# Altium PCB AnchorBoardSmall_SNS.PcbDoc (part 2 of 2)
Units mm, origin at the board's own origin, x right, y up, seen from the top; angles counter-clockwise.
Board outline 52.5 x 37.5 mm, 6 copper layers (Top Layer, Ground, Mid-Layer 2, Mid-Layer 3, Power, Bottom Layer), stack 1.141 mm thick; 164 components, 143 nets, 548 pads, 294 vias.
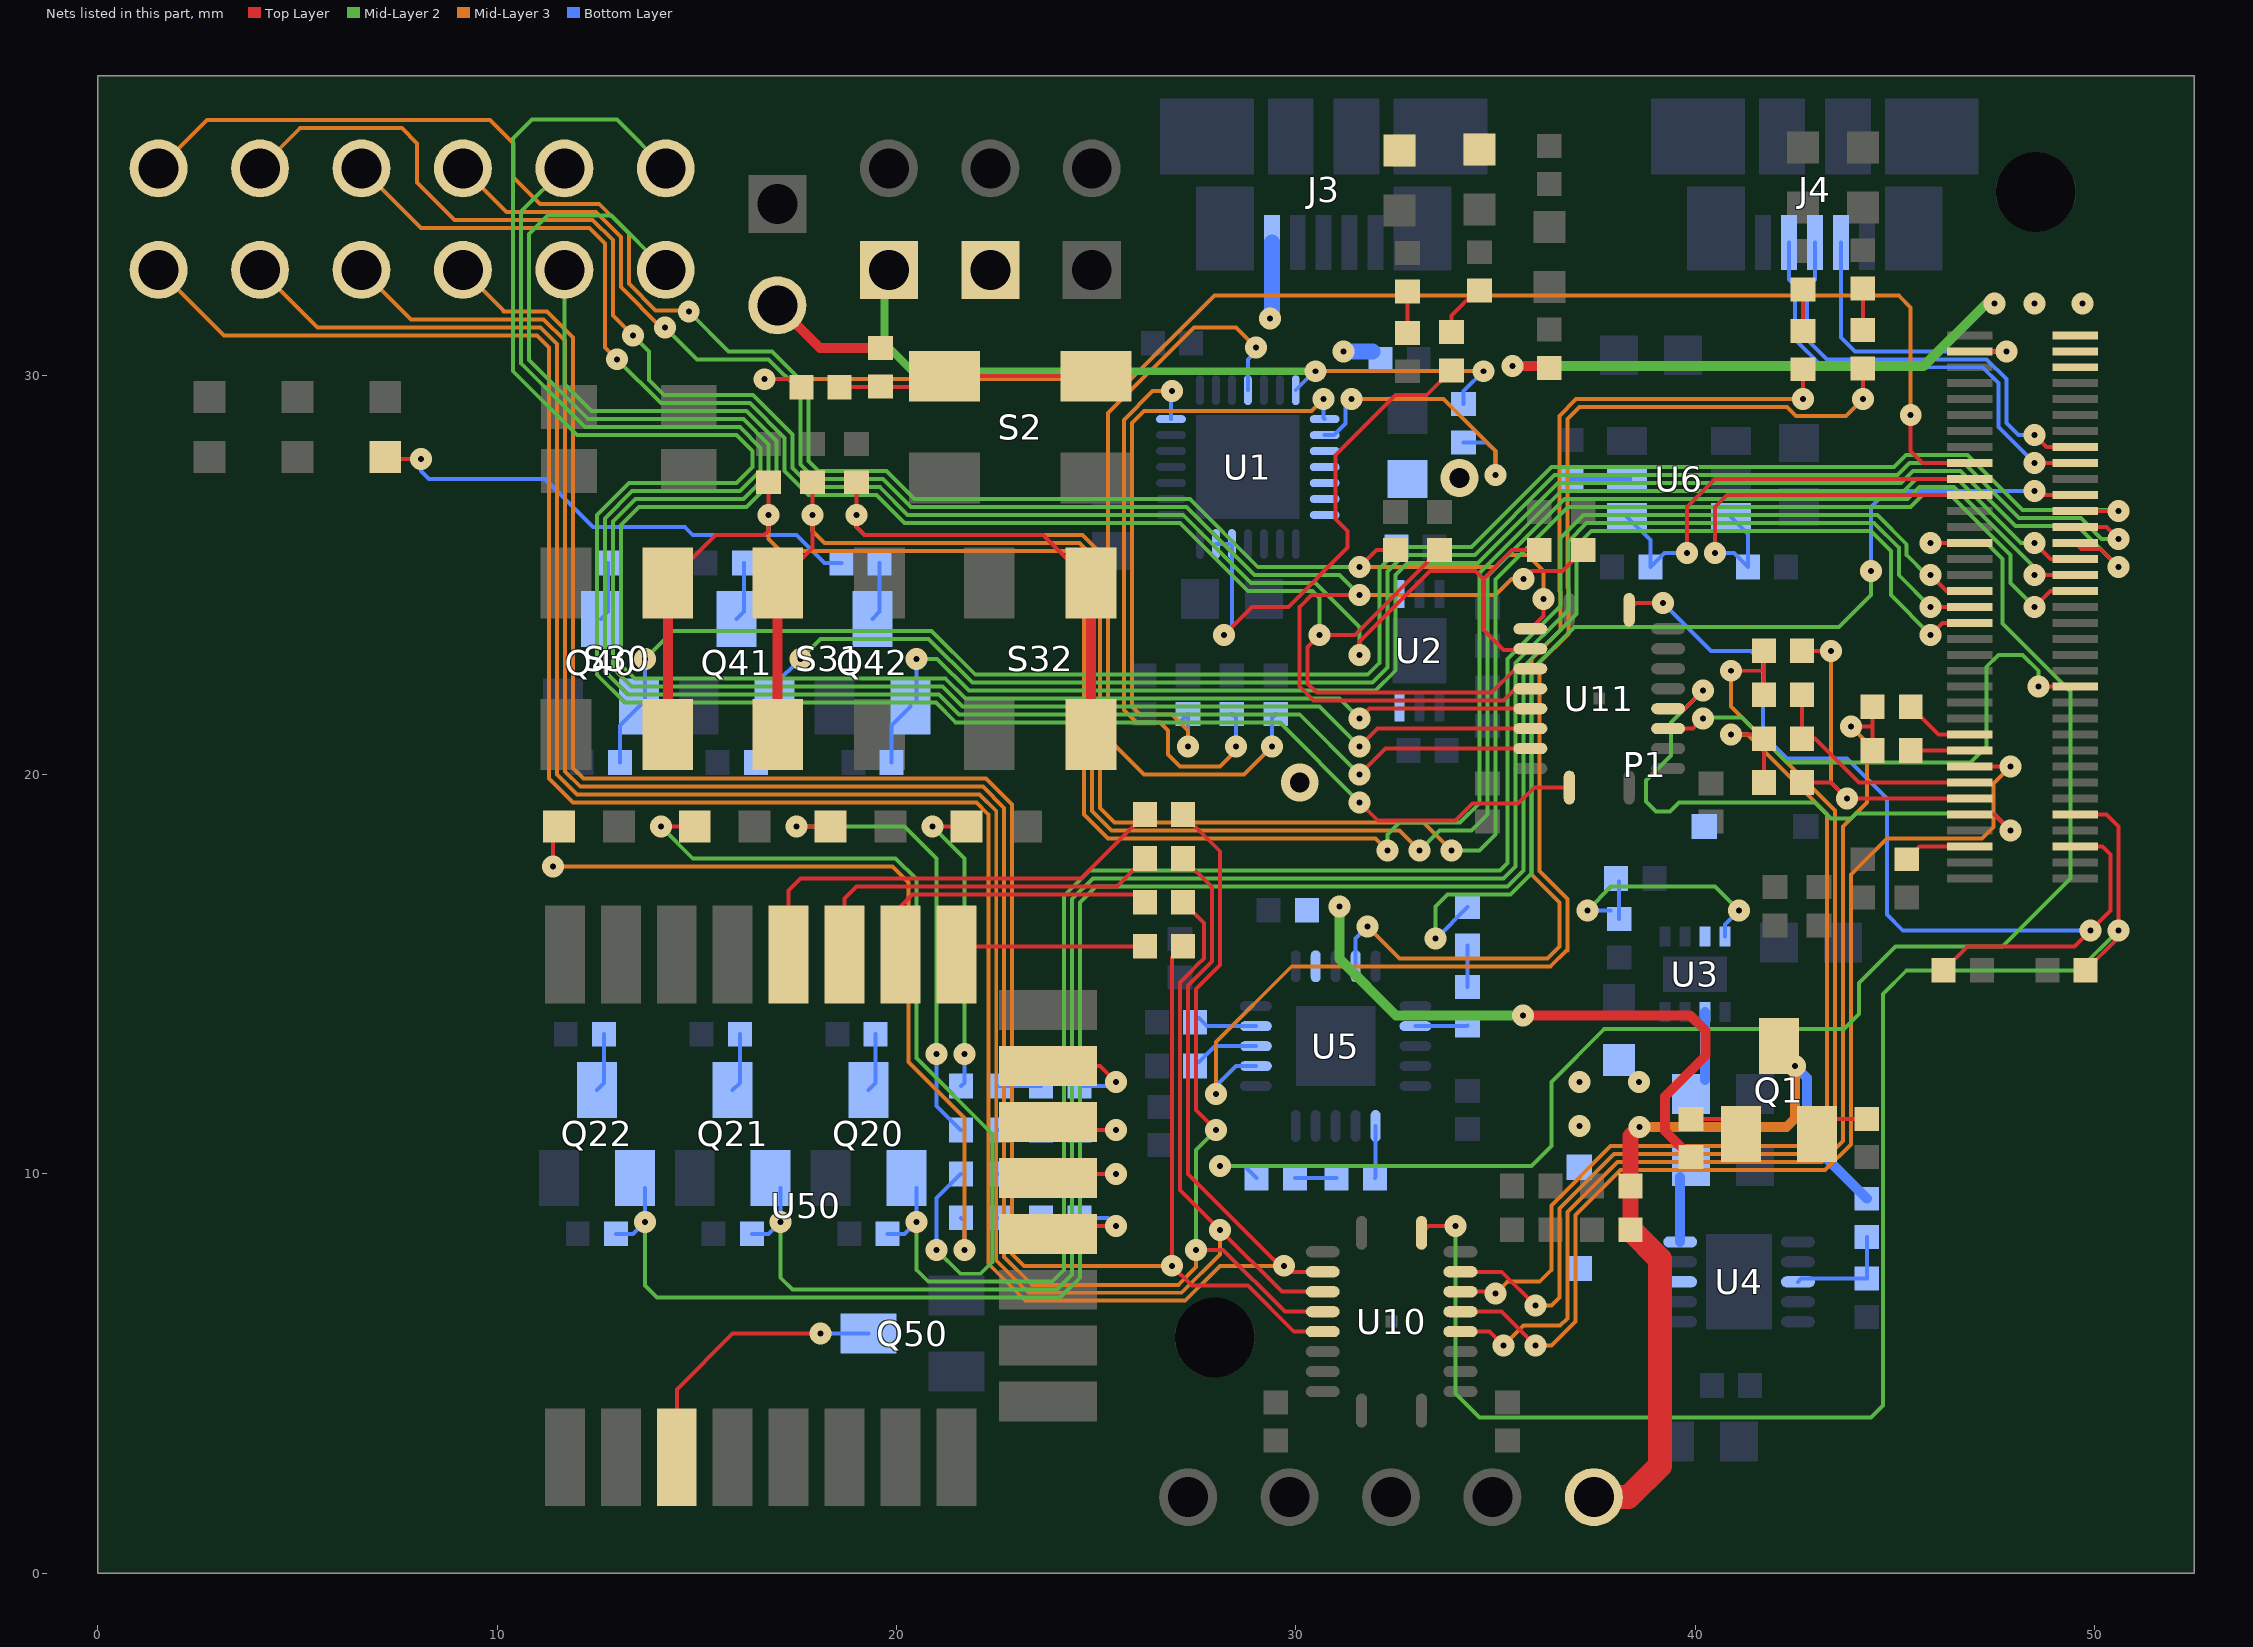
[diagram p6: the nets of this part, all layers, seen from the top]

## Via types
v1: diameter 0.55, hole 0.15, Top Layer to Bottom Layer, 287 vias
v2: diameter 0.95, hole 0.5, Top Layer to Bottom Layer, 6 vias
v3: diameter 0.55/0.55/0.55/0.55 (per signal layer), hole 0.15, Top Layer to Bottom Layer, 1 vias

## Nets (pads, with @x,y where several pads share a name; then routed paths per layer and width w, separated by ;. In a path a pad name is that pad's centre, name@x,y a point inside that pad or via, vN(x,y) a via of type N, cw(c..) or ccw(c..) an arc to the next point about the centre after c; other vN are vias at no path point) (continued)
NetD42_2: D42.2 R142.1 | length 12.7
  Top Layer w0.1: D42.2@7.2,27.95 7.25,27.9 v1(8.1,27.9)
  Bottom Layer w0.1: v1(8.1,27.9) 8.1,27.6 8.3,27.4 11.2,27.4 12.4,26.2 14.7,26.2 14.9,26 17.5,26 18.2,25.3 R142.1@18.62,25.3
NetD50_1: D50.1 R150.2 | length 7.7
  Top Layer w0.1: v1(20.9,18.7) D50.1@21.75,18.7
  Mid-Layer 2 w0.1: v1(20.9,18.7) 21.7,17.9 v1(21.7,13)
  Bottom Layer w0.1: R150.2@21.62,12.2 21.7,12.28 v1(21.7,13)
NetD51_1: D51.1 R151.2 | length 11.7
  Top Layer w0.1: v1(17.5,18.7) D51.1@18.35,18.7
  Mid-Layer 2 w0.1: v1(17.5,18.7) 20.2,18.7 21,17.9 v1(21,13)
  Bottom Layer w0.1: v1(21,13) 21,11.7 21.6,11.1 R151.2@21.62,11.1
NetD52_1: D52.1 R152.2 | length 22.1
  Top Layer w0.1: v1(14.1,18.7) D52.1@14.95,18.7
  Mid-Layer 2 w0.1: v1(14.1,18.7) 14.9,17.9 19.983,17.9 20.5,17.383 20.5,12.899 22.4,10.999 22.4,7.8 22.1,7.5 21.6,7.5 v1(21,8.1)
  Bottom Layer w0.1: v1(21,8.1) 21,9.4 21.6,10 R152.2@21.62,10
NetD53_1: D53.1 R153.2 | length 20.5
  Top Layer w0.1: v1(11.4,17.7) D53.1@11.4,18.55
  Mid-Layer 3 w0.1: v1(11.4,17.7) 19.9,17.7 20.3,17.3 20.3,12.8 21.7,11.4 v1(21.7,8.1)
  Bottom Layer w0.1: R153.2@21.62,8.9 21.7,8.82 v1(21.7,8.1)
NetJ2_1: J2.1 U2.6
  other v2: 30.1,19.8
NetL1_1: L1.1 U3.7
NetL2_2: L2.2 U4.3
NetP1_24: P1.24 Q40.1 R143.1 | length 45.8
  Top Layer w0.1: P1.24@49.52,26.6 v1(50.6,26.6)
  Mid-Layer 2 w0.1: v1(13.7,22.9) 14.4,23.6 20.883,23.6 21.983,22.5 31.8,22.5 32.1,22.8 32.1,25.166 32.634,25.7 34.4,25.7 36.4,27.7 44.986,27.7 45.286,28 46.825,28 48.2,26.625 50.575,26.625 v1(50.6,26.6)
  Bottom Layer w0.1: R143.1@13.08,20.3 13.08,21.23 13.7,21.85 v1(13.7,22.9)
NetP1_26: P1.26 Q41.1 R144.1 | length 41.9
  Top Layer w0.1: P1.26@49.52,26.2 50.3,26.2 v1(50.6,25.9)
  Mid-Layer 2 w0.1: v1(17.6,22.9) 18.1,23.4 20.8,23.4 21.9,22.3 31.266,22.3 31.917,22.3 32.3,22.683 32.3,25.083 32.717,25.5 34.483,25.5 36.483,27.5 45.069,27.5 45.369,27.8 46.731,27.8 48.106,26.425 49.658,26.425 50.183,25.9 v1(50.6,25.9)
  Bottom Layer w0.1: R144.1@16.48,20.3 16.48,21.23 Q41.1@16.95,21.7 ; Q41.1@16.95,22.25 v1(17.6,22.9)
NetP1_28: P1.28 Q42.1 R145.1 | length 39.1
  Top Layer w0.1: P1.28@49.52,25.8 49.67,25.65 50.152,25.65 50.6,25.202 v1(50.6,25.2)
  Mid-Layer 2 w0.1: v1(20.5,22.9) 21.017,22.9 21.817,22.1 31.183,22.1 32,22.1 32.5,22.6 32.5,25 32.8,25.3 34.566,25.3 36.566,27.3 45.151,27.3 45.451,27.6 46.649,27.6 48.024,26.225 49.575,26.225 v1(50.6,25.2)
  Bottom Layer w0.1: R145.1@19.88,20.3 19.88,21.231 Q42.1@20.35,21.7 ; Q42.1@20.5,21.851 v1(20.5,22.9)
NetP1_30: P1.30 R130.2 S30.2 | length 56.7
  Top Layer w0.1: S30.2@14.275,24.8 15.475,26 16.7,26 16.8,26.1 v1(16.8,26.5) R130.2@16.8,27.32 ; v1(48.5,25.8) 48.9,25.4 P1.30@49.52,25.4
  Top Layer w0.25: S30.2@14.275,21 S30.2@14.275,24.8
  Mid-Layer 2 w0.1: v1(32.3,18.1) 32.3,18.5 32.6,18.8 34.118,18.8 34.6,19.282 34.6,25.051 36.649,27.1 45.234,27.1 45.534,27.4 46.566,27.4 48.166,25.8 v1(48.5,25.8)
  Mid-Layer 3 w0.1: v1(16.8,26.5) 16.8,25.9 17.1,25.6 24.5,25.6 24.7,25.4 24.7,19 25.3,18.4 32,18.4 v1(32.3,18.1)
NetP1_32: P1.32 R131.2 S31.2 | length 54
  Top Layer w0.1: S31.2@17.025,24.8 17.9,25.675 v1(17.9,26.498) R131.2@17.9,27.32 ; v1(48.5,25) P1.32@49.52,25
  Top Layer w0.25: S31.2@17.025,21 S31.2@17.025,24.8
  Mid-Layer 2 w0.1: v1(33.1,18.1) 33.6,18.6 34.4,18.6 34.8,19 34.8,24.969 36.731,26.9 45.317,26.9 45.617,27.2 46.483,27.2 48.5,25.183 v1(48.5,25)
  Mid-Layer 3 w0.1: v1(17.9,26.498) 17.9,26.1 18.2,25.8 24.583,25.8 24.9,25.483 24.9,19.083 25.383,18.6 32.6,18.6 v1(33.1,18.1)
NetP1_33: P1.33 Q20.1 R123.1 | length 47.8
  Top Layer w0.1: v1(45.9,25) 46.3,24.6 P1.33@46.88,24.6
  Mid-Layer 2 w0.1: v1(20.5,8.8) 20.5,7.6 20.8,7.3 23.9,7.3 24.2,7.6 24.2,16.966 24.834,17.6 35.117,17.6 35.3,17.783 35.3,22.9 36.375,23.975 ; 36.376,23.975 36.625,24.224 36.625,25.925 37.2,26.5 44.566,26.5 45.3,25.766 45.3,25.5 45.8,25 v1(45.9,25)
  Bottom Layer w0.1: R123.1@19.78,8.5 20.2,8.5 v1(20.5,8.8) Q20.1@20.5,9.65
NetP1_34: P1.34 R132.2 S32.2 | length 58.5
  Top Layer w0.1: R132.2@19,27.32 v1(19,26.5) 19,26.2 19.2,26 23.675,26 S32.2@24.875,24.8 ; v1(48.5,24.2) 48.9,24.6 P1.34@49.52,24.6
  Top Layer w0.25: S32.2@24.875,21 S32.2@24.875,24.8
  Mid-Layer 2 w0.1: v1(33.9,18.1) 34.6,18.1 35,18.5 35,24.886 36.814,26.7 45.4,26.7 45.7,27 46.4,27 47.9,25.5 47.9,24.8 v1(48.5,24.2)
  Mid-Layer 3 w0.1: v1(19,26.5) 19,26.2 19.2,26 24.666,26 25.1,25.566 25.1,19.166 25.466,18.8 33.2,18.8 v1(33.9,18.1)
NetP1_35: P1.35 Q21.1 R124.1 | length 51.7
  Top Layer w0.1: v1(45.9,24.2) P1.35@46.88,24.2
  Mid-Layer 2 w0.1: v1(17.1,8.8) 17.1,7.4 17.4,7.1 24.017,7.1 24.4,7.483 24.4,16.883 24.917,17.4 35.2,17.4 35.5,17.7 35.5,22.8 36.825,24.125 36.825,25.842 37.283,26.3 44.483,26.3 45.1,25.683 45.1,25 v1(45.9,24.2)
  Bottom Layer w0.1: R124.1@16.38,8.5 16.8,8.5 v1(17.1,8.8) Q21.1@17.1,9.65
NetP1_37: P1.37 Q22.1 R125.1 | length 55.9
  Top Layer w0.1: v1(45.9,23.5) 46.2,23.8 P1.37@46.88,23.8
  Mid-Layer 2 w0.1: v1(13.7,8.8) 13.7,7.2 14,6.9 24.1,6.9 24.6,7.4 24.6,16.8 25,17.2 35.3,17.2 35.7,17.6 35.7,22.7 37.025,24.025 37.025,25.725 37.4,26.1 44.4,26.1 44.9,25.6 44.9,24.5 v1(45.9,23.5)
  Bottom Layer w0.1: R125.1@12.98,8.5 13.4,8.5 v1(13.7,8.8) Q22.1@13.7,9.65
NetP1_51: P1.51 R105.1 | length 1.8
  Top Layer w0.1: R105.1@45.4,21.7 46.1,21 P1.51@46.88,21
NetP1_53: P1.53 R106.1 | length 1.5
  Top Layer w0.1: R106.1@45.4,20.6 P1.53@46.88,20.6
NetP1_55: P1.55 U10.6 | length 27.3
  Top Layer w0.1: U10.6@34.125,6.55 35.15,6.55 v1(36,5.7) ; P1.55@46.88,20.2 v1(47.9,20.2)
  Mid-Layer 3 w0.1: v1(36,5.7) 36.4,5.7 37,6.3 37,8.966 38.134,10.1 43.259,10.1 43.9,10.741 43.9,17.5 44.8,18.4 47.183,18.4 47.475,18.692 47.475,19.775 v1(47.9,20.2)
NetP1_57: P1.57 R101.2 R104.2 | length 5.8
  Top Layer w0.1: R104.2@42.68,22 R101.2@42.68,20.9 43,20.9 44.1,19.8 P1.57@46.88,19.8
NetP1_59: P1.59 R102.2 R103.2 | length 9
  Top Layer w0.1: R102.2@42.68,19.8 43.4,19.8 v1(43.8,19.4) P1.59@46.88,19.4 ; R103.2@42.68,23.1 v1(43.4,23.1)
  Mid-Layer 3 w0.1: v1(43.4,23.1) 43.4,19.8 v1(43.8,19.4)
NetP1_65: P1.65 R100.1 | length 1.7
  Top Layer w0.1: R100.1@45.3,17.88 45.62,18.2 P1.65@46.88,18.2
NetQ1_1: Q1.1 R13.2 | length 1.4
  Top Layer w0.1: R13.2@39.9,11.38 40.77,11.38 Q1.1@41.15,11
NetQ1_2: Q1.2 R14.1 | length 1.4
  Top Layer w0.1: Q1.2@43.05,11 43.43,11.38 R14.1@44.3,11.38
NetQ20_3: Q20.3 R120.1 | length 1.5
  Bottom Layer w0.1: Q20.3@19.3,12.1 19.48,12.28 R120.1@19.48,13.5
NetQ21_3: Q21.3 R121.1 | length 1.5
  Bottom Layer w0.1: Q21.3@15.9,12.1 16.08,12.28 R121.1@16.08,13.5
NetQ22_3: Q22.3 R122.1 | length 1.5
  Bottom Layer w0.1: Q22.3@12.5,12.1 12.68,12.28 R122.1@12.68,13.5
NetQ40_3: Q40.3 R140.2 | length 1.5
  Bottom Layer w0.1: Q40.3@12.6,23.9 12.78,24.08 R140.2@12.78,25.3
NetQ41_3: Q41.3 R141.2 | length 1.5
  Bottom Layer w0.1: Q41.3@16,23.9 16.18,24.08 R141.2@16.18,25.3
NetQ42_3: Q42.3 R142.2 | length 1.5
  Bottom Layer w0.1: Q42.3@19.4,23.9 19.58,24.081 R142.2@19.58,25.3
NetQ50_3: Q50.3 U50.3 | length 6.4
  Top Layer w0.1: U50.3@14.5,3.6 14.5,4.6 15.9,6 v1(18.1,6)
  Bottom Layer w0.1: v1(18.1,6) Q50.3@19.3,6
NetR1_1: R1.1 U1.7 | length 14.3
  Mid-Layer 3 w0.1: v1(26.9,29.6) 26.417,29.6 25.7,28.883 25.7,21.617 26.017,21.3 26.6,21.3 26.8,21.1 26.8,20.5 27.1,20.2 28.1,20.2 28.5,20.6 v1(28.5,20.7)
  Bottom Layer w0.1: U1.7@26.875,28.9 26.875,29.575 v1(26.9,29.6) ; R1.1@28.4,21.52 28.5,21.42 v1(28.5,20.7)
NetR2_1: R2.1 U1.11 | length 19.7
  Mid-Layer 3 w0.1: v1(29,30.7) 28.5,31.2 27.451,31.2 25.3,29.049 25.3,20.9 26.2,20 28.7,20 v1(29.4,20.7)
  Bottom Layer w0.1: U1.11@28.8,29.625 28.8,30.4 29,30.6 v1(29,30.7) ; v1(29.4,20.7) 29.4,21.42 R2.1@29.5,21.52
NetR3_2: R3.2 U1.15 | length 15.8
  Mid-Layer 3 w0.1: v1(27.3,20.7) 27.3,21.1 26.9,21.5 26.1,21.5 25.9,21.7 25.9,28.8 26.2,29.1 30.4,29.1 v1(30.7,29.4)
  Bottom Layer w0.1: R3.2@27.1,21.32 R3.2@27.3,21.52 v1(27.3,20.7) ; v1(30.7,29.4) 30.7,28.925 U1.15@30.725,28.9
NetR4_1: R4.1 R15.1 U1.14 | length 18.9
  Mid-Layer 2 w0.2: R15.1@19.812,32.639 19.7,32.527 19.7,30.8 20.4,30.1 v1(30.5,30.1)
  Mid-Layer 3 w0.1: v1(30.5,30.1) v1(34.7,30.1)
  Bottom Layer w0.1: U1.14@30,29.625 30.475,30.1 v1(30.5,30.1) ; R4.1@34.2,29.28 34.2,29.6 v1(34.7,30.1)
NetR4_2: R4.2 U1.16 | length 7.5
  Mid-Layer 3 w0.1: v1(31.4,29.4) 33.7,29.4 35,28.1 v1(35,27.5)
  Bottom Layer w0.1: U1.16@30.725,28.5 30.954,28.5 31.25,28.796 31.25,29.25 v1(31.4,29.4) ; R4.2@34.2,28.32 34.78,28.32 35,28.1 v1(35,27.5)
NetR5_1: R5.1 U1.26 U1.27 | length 13
  Top Layer w0.1: v1(28.2,23.5) 28.9,24.2 29.817,24.2 31.3,25.683 31.3,26.1 31,26.4 31,28 32.5,29.5 33.28,29.5 R5.1@33.9,30.12
  Bottom Layer w0.1: U1.27@28,25.775 28.2,25.775 U1.26@28.4,25.775 28.4,23.7 v1(28.2,23.5)
NetR5_2: R5.2 R6.2 | length 1.4
  Top Layer w0.1: R5.2@33.9,31.08 33.9,31.5 34.52,32.12 R6.2@34.6,32.12
NetR7_2: R7.2 R8.1 | length 1
  Top Layer w0.1: R7.2@32.8,31.06 R8.1@32.8,32.1
NetR11_2: R11.2 R12.2 S2.1 | length 6.5
  Top Layer w0.1: R11.2@18.58,29.7 20.925,29.7 S2.1@21.2,29.975 S2.1@25,29.975
NetR30_2: R30.2 R31.1 U3.8 | length 6.6
  Mid-Layer 2 w0.1: v1(37.3,16.6) 37.9,17.2 40.5,17.2 v1(41.1,16.6)
  Bottom Layer w0.1: v1(37.3,16.6) R30.2@37.88,16.6 ; R30.2@38.1,16.38 R31.1@38.1,17.32 ; U3.8@40.75,15.95 40.75,16.25 v1(41.1,16.6)
NetR40_1: R40.1 R41.2 U4.8 | length 2.8
  Bottom Layer w0.1: U4.8@42.577,7.298 42.656,7.378 R41.2@44.302,7.378 R40.1@44.302,8.418
NetR50_2: R50.2 U5.9 | length 1.5
  Bottom Layer w0.1: R50.2@27.58,13.9 27.78,13.7 U5.9@29,13.7
NetR51_2: R51.2 U5.8 | length 1.6
  Bottom Layer w0.1: R51.2@27.58,12.8 27.98,13.2 U5.8@29,13.2
NetR52_1: R52.1 R58.1 | length 1
  Bottom Layer w0.1: R52.1@34.3,14.68 R58.1@34.3,15.72
NetR52_2: R52.2 U5.17 | length 1.3
  Bottom Layer w0.1: U5.17@33,13.7 34.28,13.7 R52.2@34.3,13.72
NetR53_1: R53.1 R59.1 | length 1
  Bottom Layer w0.1: R59.1@29.98,9.9 R53.1@31.02,9.9
NetR53_2: R53.2 U5.1 | length 1.3
  Bottom Layer w0.1: R53.2@31.98,9.9 32,9.92 U5.1@32,11.2
NetR54_2: R54.2 R56.2 | length 1
  Top Layer w0.1: R56.2@42.7,31.11 R54.2@42.7,32.15
NetR55_1: R55.1 R57.2 | length 1
  Top Layer w0.1: R57.2@44.2,31.13 R55.1@44.2,32.17
NetR56_1: R56.1 U5.14 | length 27.3
  Top Layer w0.1: v1(42.7,29.4) R56.1@42.7,30.15
  Mid-Layer 3 w0.1: v1(31.8,16.2) 32.6,15.4 36.3,15.4 36.6,15.7 36.6,16.8 35.9,17.5 35.9,22.9 36.625,23.625 36.625,24.576 36.6,24.601 36.6,28.983 37.017,29.4 v1(42.7,29.4)
  Bottom Layer w0.1: U5.14@31.5,15.2 31.5,15.9 v1(31.8,16.2)
NetR57_1: R57.1 U5.7 | length 34.9
  Top Layer w0.1: v1(44.2,29.4) R57.1@44.2,30.17
  Mid-Layer 3 w0.1: v1(28,12) 28,13.3 29.9,15.2 36.383,15.2 36.783,15.6 36.8,15.6 36.8,16.883 36.1,17.583 36.1,22.8 36.825,23.525 36.825,24.659 36.8,24.684 36.8,28.9 37.1,29.2 42.299,29.2 42.524,28.975 43.775,28.975 v1(44.2,29.4)
  Bottom Layer w0.1: v1(28,12) 28,12.2 28.5,12.7 U5.7@29,12.7
NetR60_1: R60.1 U6.5 | length 1.4
  Bottom Layer w0.25: R60.1@36.92,27.4 U6.5@38.3,27.4
NetR101_1: R101.1 R102.1 U10.7 | length 24.9
  Top Layer w0.1: U10.7@34.125,7.05 34.95,7.05 v1(35,7) ; v1(40.9,21) R101.1@41.62,21 ; R102.1@41.72,19.8 R101.1@41.72,20.9
  Mid-Layer 3 w0.1: v1(35,7) 35.3,7.3 36.1,7.3 36.4,7.6 36.4,9.214 37.886,10.7 43.01,10.7 43.3,10.99 43.3,19.016 41.316,21 v1(40.9,21)
NetR103_1: R103.1 R104.1 U10.8 | length 27.5
  Top Layer w0.1: U10.8@34.125,7.55 35.15,7.55 v1(36,6.7) ; v1(40.9,22.6) 41.72,22.6 ; R104.1@41.72,22 41.72,22.6 ; R103.1@41.72,23.1 41.72,22.6
  Mid-Layer 3 w0.1: v1(36,6.7) 36.4,6.7 36.6,6.9 36.6,9.131 37.969,10.5 43.093,10.5 43.5,10.907 43.5,19.099 40.9,21.699 v1(40.9,22.6)
NetR105_2: R105.2 R106.2 U10.5 | length 25.8
  Top Layer w0.1: U10.5@34.125,6.05 34.85,6.05 v1(35.2,5.7) ; v1(43.9,21.2) 44.44,21.2 ; R106.2@44.44,20.6 44.44,21.2 ; R105.2@44.44,21.7 44.44,21.2
  Mid-Layer 3 w0.1: v1(35.2,5.7) 35.7,6.2 36.617,6.2 36.8,6.383 36.8,9.049 38.051,10.3 43.176,10.3 43.7,10.824 43.7,18.7 43.975,18.975 ; v1(43.9,21.2) 44.3,20.8 44.3,19.299 43.976,18.975
NetR108_1: R108.1 TP108.1 U10.16 | length 53.6
  Top Layer w0.1: R108.1@27.18,15.7 26.9,15.42 v1(26.9,7.7) 27.4,7.2 28.8,7.2 29.95,6.05 U10.16@30.675,6.05
  Mid-Layer 3 w0.1: TP108.1@9.144,32.639 10.16,31.623 10.16,31.6 11.249,31.6 11.9,30.949 11.9,20.166 12.166,19.9 22.249,19.9 22.9,19.249 22.9,8 23.2,7.7 v1(26.9,7.7)
NetR109_1: R109.1 TP109.1 U10.15 | length 60.7
  Top Layer w0.1: R109.1@27.18,19 28.1,18.08 28.1,15.232 27.5,14.632 27.5,11.6 v1(28,11.1) ; v1(27.5,8.1) 28.183,8.1 29.733,6.55 U10.15@30.675,6.55
  Mid-Layer 2 w0.1: v1(27.5,8.1) 27.5,10.6 v1(28,11.1)
  Mid-Layer 3 w0.1: TP109.1@6.604,32.639 7.843,31.4 11.166,31.4 11.7,30.866 11.7,20.083 12.083,19.7 22.166,19.7 22.7,19.166 22.7,7.917 23.393,7.224 27.059,7.224 27.5,7.666 v1(27.5,8.1)
NetR110_1: R110.1 TP110.1 U10.14 | length 60.9
  Top Layer w0.1: R110.1@27.18,16.8 27.7,16.28 27.7,15.398 27.542,15.24 27.54,15.24 27.4,15.1 27.4,15.098 27.1,14.798 27.1,12 27.1,9.6 v1(28.1,8.6) 29.65,7.05 U10.14@30.675,7.05
  Mid-Layer 3 w0.1: TP110.1@4.064,32.639 5.503,31.2 11.083,31.2 11.5,30.783 11.5,20 12,19.5 22.083,19.5 22.5,19.083 22.5,7.834 23.31,7.024 27.141,7.024 28.1,7.983 v1(28.1,8.6)
NetR111_1: R111.1 TP111.1 U10.13 | length 64.9
  Top Layer w0.1: R111.1@27.18,17.9 27.9,17.18 27.9,15.315 27.3,14.715 27.3,11.9 27.3,10 ; 27.301,10 v1@29.601,7.7 ; v1(29.7,7.7) 29.85,7.55 U10.13@30.675,7.55
  Mid-Layer 3 w0.1: TP111.1@1.524,32.639 3.163,31 11,31 11.3,30.7 11.3,19.9 11.9,19.3 22,19.3 22.3,19 22.3,7.751 23.227,6.824 27.224,6.824 28.1,7.7 v1(29.7,7.7)
NetR114_1: R114.1 TP104.1 U11.15 | length 44.4
  Top Layer w0.1: v1(31.6,24.5) 30.4,24.5 30.1,24.2 30.1,22.2 30.45,21.85 35.2,21.85 35.5,22.15 U11.15@35.875,22.15 ; v1(35.7,24.9) 35.9,25.1 36.68,25.1 R114.1@37.2,25.62
  Mid-Layer 2 w0.1: v1(14.2,31.2) 15.001,30.4 16.801,30.4 17.6,29.601 17.6,27.766 17.966,27.4 19.666,27.4 20.366,26.7 27.266,26.7 28.966,25 31.1,25 v1(31.6,24.5)
  Mid-Layer 3 w0.1: TP104.1@9.144,35.179 10.233,34.09 12.476,34.09 13.1,33.466 13.1,32.21 14.11,31.2 v1(14.2,31.2) ; v1(31.6,24.5) 35,24.5 35.4,24.9 v1(35.7,24.9)
NetR115_1: R115.1 TP105.1 U11.14 | length 42.5
  Top Layer w0.1: R115.1@33.6,25.62 31.48,23.5 v1(30.6,23.5) 30.3,23.2 30.3,22.283 30.533,22.05 34.9,22.05 35.5,22.65 U11.14@35.875,22.65
  Mid-Layer 2 w0.1: v1(13,30.4) 14.1,29.3 16.331,29.3 17.2,28.431 17.2,27.6 17.8,27 19.5,27 20.2,26.3 27.1,26.3 28.8,24.6 30.417,24.6 30.6,24.417 v1(30.6,23.5)
  Mid-Layer 3 w0.1: TP105.1@6.604,35.179 8.093,33.69 12.31,33.69 12.7,33.3 12.7,30.7 v1(13,30.4)
NetR116_1: R116.1 TP106.1 U11.13 | length 45
  Top Layer w0.1: v1(31.6,23) 31.6,23.337 33.363,25.1 34.5,25.1 34.7,24.9 ; U11.13@35.875,23.15 35.875,23.125 35.2,23.125 34.7,23.625 34.7,24.9 ; R116.1@36.1,25.62 35.42,25.62 34.7,24.9
  Mid-Layer 2 w0.1: v1(13.4,31) 13.8,30.6 13.8,29.883 14.183,29.5 16.414,29.5 17.4,28.514 17.4,27.683 17.883,27.2 19.583,27.2 20.283,26.5 27.183,26.5 28.883,24.8 30.5,24.8 31.6,23.7 v1(31.6,23)
  Mid-Layer 3 w0.1: TP106.1@4.064,35.179 5.071,36.186 7.614,36.186 8,35.8 8,34.828 8.938,33.89 12.393,33.89 12.9,33.383 12.9,31.5 v1(13.4,31)
NetR117_1: R117.1 TP107.1 U11.12 | length 45.1
  Top Layer w0.1: v1(31.6,25.2) 32.02,25.62 R117.1@32.5,25.62 ; U11.12@35.875,23.65 36.2,23.975 v1(36.2,24.4)
  Mid-Layer 2 w0.1: v1(14.8,31.6) 15.8,30.6 16.884,30.6 17.8,29.684 17.8,27.849 18.049,27.6 19.749,27.6 20.449,26.9 27.349,26.9 29.049,25.2 v1(31.6,25.2)
  Mid-Layer 3 w0.1: TP107.1@1.524,35.179 2.731,36.386 9.828,36.386 10.414,35.8 10.414,34.954 11.078,34.29 12.559,34.29 13.3,33.549 13.3,32.293 13.968,31.625 14.775,31.625 v1(14.8,31.6) ; v1(31.6,25.2) 35,25.2 35.3,25.5 35.8,25.5 36.2,25.1 v1(36.2,24.4)
NetR150_1: R150.1 R154.2 | length 1
  Bottom Layer w0.1: R150.1@22.58,12.2 R154.2@23.62,12.2
NetR151_1: R151.1 R155.2 | length 1
  Bottom Layer w0.1: R151.1@22.58,11.1 R155.2@23.62,11.1
NetR152_1: R152.1 R156.2 | length 1
  Bottom Layer w0.1: R152.1@22.58,10 R156.2@23.62,10
NetR153_1: R153.1 R157.2 | length 1
  Bottom Layer w0.1: R153.1@22.58,8.9 R157.2@23.62,8.9
NetR154_1: R154.1 U50.15 | length 2.8
  Top Layer w0.1: U50.15@23.795,12.7 25.1,12.7 v1(25.5,12.3)
  Bottom Layer w0.1: R154.1@24.58,12.2 25.4,12.2 v1(25.5,12.3)
NetR155_1: R155.1 U50.14 | length 2.7
  Top Layer w0.1: U50.14@23.795,11.3 23.995,11.1 v1(25.5,11.1)
  Bottom Layer w0.1: R155.1@24.58,11.1 v1(25.5,11.1)
NetR156_1: R156.1 U50.13 | length 2.7
  Top Layer w0.1: U50.13@23.795,9.9 23.895,10 v1(25.5,10)
  Bottom Layer w0.1: R156.1@24.58,10 v1(25.5,10)
NetR157_1: R157.1 U50.12 | length 2.8
  Top Layer w0.1: U50.12@23.795,8.5 23.995,8.7 v1(25.5,8.7)
  Bottom Layer w0.1: R157.1@24.58,8.9 25.3,8.9 v1(25.5,8.7)
NetTP100_1: TP100.1 U11.20 | length 52.2
  Top Layer w0.1: v1(31.6,19.3) 32.054,18.846 34.004,18.846 34.428,19.27 35.57,19.27 35.975,19.675 U11.20@36.85,19.675
  Mid-Layer 2 w0.1: TP100.1@14.224,35.179 13.003,36.4 10.873,36.4 10.4,35.927 10.4,30.1 12,28.5 16,28.5 16.4,28.1 16.4,27.7 16,27.3 13.3,27.3 12.5,26.5 12.5,22.5 13.2,21.8 20.986,21.8 21.486,21.3 29.6,21.3 v1(31.6,19.3)
NetTP101_1: TP101.1 U11.18 | length 45.5
  Top Layer w0.1: v1(31.6,20) 32.25,20.65 U11.18@35.875,20.65
  Mid-Layer 2 w0.1: TP101.1@11.684,35.179 10.6,34.095 10.6,30.3 12.2,28.7 12.3,28.7 16.083,28.7 16.6,28.183 16.6,27.617 16.083,27.1 13.383,27.1 12.7,26.417 12.7,22.583 13.283,22 21.069,22 21.569,21.5 30.1,21.5 v1(31.6,20)
NetTP102_1: TP102.1 U11.17 | length 47
  Top Layer w0.1: v1(31.6,20.7) 32.05,21.15 U11.17@35.875,21.15
  Mid-Layer 2 w0.1: TP102.1@14.224,32.639 12.863,34 11.267,34 10.8,33.533 10.8,30.383 12.283,28.9 16.166,28.9 16.8,28.266 16.8,27.534 16.166,26.9 13.466,26.9 12.9,26.334 12.9,22.666 13.366,22.2 21.151,22.2 21.651,21.7 30.6,21.7 v1(31.6,20.7)
NetTP103_1: TP103.1 U11.16 | length 41
  Top Layer w0.1: v1(31.6,21.4) 31.85,21.65 U11.16@35.875,21.65
  Mid-Layer 2 w0.1: TP103.1@11.684,32.639 11.684,29.782 12.366,29.1 16.249,29.1 17,28.349 17,27.451 16.249,26.7 13.549,26.7 13.1,26.251 13.1,22.749 13.449,22.4 21.234,22.4 21.734,21.9 31.1,21.9 v1(31.6,21.4)
PWRBTN: P1.17 R11.1 | length 35.9
  Top Layer w0.1: v1(16.7,29.9) 17.42,29.9 R11.1@17.62,29.7 ; v1(45.4,29) 45.4,28.1 45.7,27.8 P1.17@46.88,27.8
  Mid-Layer 3 w0.1: v1(16.7,29.9) 25.869,29.9 27.969,32 45.1,32 45.4,31.7 v1(45.4,29)
SPI_DECA.CS: R108.2 U50.17 | length 4.5
  Top Layer w0.1: U50.17@21.5,15.495 U50.17@21.505,15.5 ; U50.17@21.705,15.7 R108.2@26.22,15.7
SPI_DECA.MISO: R111.2 U50.19 | length 9.3
  Top Layer w0.1: U50.19@18.7,15.495 18.7,16.9 19,17.2 25.52,17.2 R111.2@26.22,17.9
SPI_DECA.MOSI: R110.2 U50.18 | length 6
  Top Layer w0.1: U50.18@20.1,16.7 20.4,17 R110.2@26.02,17
SPI_DECA.SCK: R109.2 U50.20 | length 11.3
  Top Layer w0.1: U50.20@17.3,15.495 17.3,17.1 17.6,17.4 24.62,17.4 R109.2@26.22,19
TXB_OE_1: P1.62 R202.1 U10.10 | length 38.2
  Top Layer w0.1: U10.10@33.15,8.525 33.325,8.7 v1(34,8.7) ; P1.62@49.52,19 50.3,19 50.6,18.7 v1(50.6,16.1) 50.6,15.92 R202.1@49.78,15.1
  Mid-Layer 2 w0.1: v1(34,8.7) 34,4.5 34.6,3.9 44.4,3.9 44.7,4.2 44.7,14.5 45.3,15.1 49.6,15.1 v1(50.6,16.1)
TXB_OE_2: P1.66 R201.1 U11.10 | length 24.9
  Top Layer w0.1: U11.10@38.35,24.125 38.525,24.3 v1(39.2,24.3) ; R201.1@46.22,15.1 46.82,15.7 49.5,15.7 v1(49.9,16.1) 50.4,16.6 50.4,18 50.2,18.2 P1.66@49.52,18.2
  Bottom Layer w0.1: v1(39.2,24.3) 40.4,23.1 41.4,23.1 41.7,22.8 41.7,21 42.3,20.4 43.8,20.4 44.8,19.4 44.8,16.5 45.2,16.1 v1(49.9,16.1)
UART1_RX: P1.61 U11.5 | length 15.3
  Top Layer w0.1: U11.5@39.325,21.65 39.75,21.65 v1(40.2,22.1) ; P1.61@46.88,19 47.5,19 v1(47.9,18.6)
  Mid-Layer 2 w0.1: v1(40.2,22.1) 39.4,21.3 39.4,20.476 38.775,19.851 38.775,19.324 39.024,19.075 39.376,19.075 39.601,19.3 43,19.3 43.4,18.9 43.9,18.9 43.975,18.975 ; 43.976,18.975 44.026,19.025 47.475,19.025 v1(47.9,18.6)
UART1_TX: P1.46 U11.4 | length 13.6
  Top Layer w0.1: U11.4@39.325,21.15 39.95,21.15 v1(40.2,21.4) ; v1(48.6,22.2) P1.46@49.52,22.2
  Mid-Layer 2 w0.1: v1(40.2,21.4) 40.225,21.425 41.175,21.425 42.3,20.3 46.9,20.3 47.3,20.7 47.3,22.7 47.6,23 48.2,23 48.6,22.6 v1(48.6,22.2)
UART_2_RX: P1.22 R58.2 | length 26.6
  Top Layer w0.1: v1(48.5,27.1) 48.6,27 P1.22@49.52,27
  Mid-Layer 2 w0.1: v1(33.5,15.9) 33.5,16.7 33.8,17 35.383,17 35.9,17.517 35.9,22.617 36.983,23.7 43.6,23.7 44.4,24.5 v1(44.4,25.1)
  Bottom Layer w0.1: v1(33.5,15.9) 33.52,15.9 R58.2@34.3,16.68 ; v1(44.4,25.1) 44.4,26.7 44.8,27.1 v1(48.5,27.1)
UART_2_TX: P1.27 R59.2 | length 38.4
  Top Layer w0.1: v1(45.9,25.8) P1.27@46.88,25.8
  Mid-Layer 2 w0.1: v1(28.1,10.2) 35.9,10.2 36.4,10.7 36.4,12.3 37.725,13.625 43.725,13.625 44.1,14 44.1,14.783 45.017,15.7 47.7,15.7 49.4,17.4 49.4,22.083 47.7,23.783 47.7,25.4 47.3,25.8 v1(45.9,25.8)
  Bottom Layer w0.1: v1(28.1,10.2) 28.72,10.2 R59.2@29.02,9.9
USB_DN: J4.2 P1.18 | length 11.4
  Top Layer w0.1: v1(48.5,27.8) P1.18@49.52,27.8
  Bottom Layer w0.1: J4.2@42.35,33.325 42.35,32.4 42.5,32.25 42.5,30.9 43.2,30.2 47.2,30.2 47.6,29.8 47.6,28.7 v1(48.5,27.8)
USB_DP: J4.3 P1.16 | length 11
  Top Layer w0.1: v1(48.5,28.5) 48.8,28.2 P1.16@49.52,28.2
  Bottom Layer w0.1: J4.3@43,33.325 43,32.4 42.8,32.2 42.8,30.9 43.3,30.4 47.3,30.4 47.8,29.9 47.8,28.8 48.1,28.5 v1(48.5,28.5)
USB_FAULT: P1.19 R62.2 U6.4 | length 11.1
  Top Layer w0.1: v1(39.8,25.55) 39.8,26.7 40.5,27.4 P1.19@46.88,27.4
  Bottom Layer w0.1: U6.4@38.3,26.45 38.88,25.87 R62.2@38.88,25.2 39.23,25.55 v1(39.8,25.55)
USB_ID: J4.4 P1.3 | length 7.6
  Top Layer w0.1: P1.3@46.88,30.6 v1(47.8,30.6)
  Bottom Layer w0.1: J4.4@43.65,33.325 43.65,30.95 44,30.6 v1(47.8,30.6)
USB_PSW: P1.21 R61.1 U6.3 | length 10
  Top Layer w0.1: v1(40.5,25.55) 40.5,26.7 40.8,27 P1.21@46.88,27
  Bottom Layer w0.1: v1(40.5,25.55) 40.97,25.55 R61.1@41.32,25.2 41.32,26.03 U6.3@40.9,26.45
V_BATT: C6.2 U1.20 U1.21 U2.1
V_CHG_USB: C5.2 C50.2 J3.1 R13.1 U1.18 U1.19 U5.12 | length 17
  Top Layer w0.25: v1(35.687,13.97) 39.878,13.97 40.259,13.589 40.259,12.954 39.243,11.938 39.243,11.077 R13.1@39.9,10.42
  Mid-Layer 2 w0.25: v1(31.1,16.7) 31.1,15.382 32.512,13.97 v1(35.687,13.97)
  Bottom Layer w0.4: v1(29.35,31.425) 29.4,31.475 J3.1@29.4,33.325
  other v2: 34.1,27.425
V_LDO: C4.2 D1.1 D2.1 U1.17 | length 0.7
  Bottom Layer w0.4: v1(31.2,30.6) C4.2@31.92,30.6
VSYS: C7.2 C9.2 D4.1 JP1.2 L2.1 P1.2 P1.4 P1.6 Q1.3 R9.1 R12.1 R40.2 R203.2 R206.2 TP1.1 U3.2 U4.5 | length 40.2
  Top Layer w0.25: JP1.2@17.018,31.75 18.088,30.68 R12.1@19.6,30.68 ; v1(35.433,30.226) 36.309,30.226 R9.1@36.35,30.185
  Top Layer w0.4: R206.2@38.38,8.6 R203.2@38.38,9.699 38.38,10.948 v1(38.608,11.176)
  Top Layer w0.6: TP1.1@37.465,1.905 38.33,1.905 39.116,2.691 39.116,7.874 38.39,8.6 R206.2@38.38,8.6
  Mid-Layer 2 w0.25: v1(35.433,30.226) 45.72,30.226 47.294,31.8 v1(47.5,31.8)
  Mid-Layer 3 w0.25: v1(38.608,11.176) 42.291,11.176 42.5,11.385 v1(42.5,12.7)
  Bottom Layer w0.25: U4.5@39.627,8.298 C9.2@39.627,9.927 ; C7.2@40.25,12.35 U3.2@40.25,14.05 ; v1(42.5,12.7) 42.799,12.401 42.799,10.881 R40.2@44.302,9.378
  other v1: 37.1,11.2 37.1,12.3 38.6,12.3 48.5,31.8 49.7,31.8
pads on no net: J3.4 P1.0 P1.7 P1.8 P1.10 P1.23 P1.29 P1.31 P1.36 P1.38 P1.39 P1.40 P1.44 P1.49 P1.63 P1.67 P1.68 P1.69 U1.25 U1.28 U2.7 U5.2 U5.4 U5.5 U5.6 U5.10 U5.15 U5.16 U5.18 U5.19 U50.4 U50.9 U50.10 U50.11
copper on no net:
  other v1: 33.1,22.65 33.1,23.55

## Polygon pours and split planes (outlines as drawn)
3V3 on Bottom Layer "3V3_Bridge" (solid, pour order 54): 33,20.1 33,18.9 34.3,18.9 35.4,17.8 37.1,17.8 37.4,18.1 37.4,20.1
NetJ2_1 on Bottom Layer "VBATT_U2" (solid, pour order 48): 32.7,21.3 32.7,22.1 32,22.1 32,22.4 30,22.4 30,20.6 29.3,19.9 29.3,19.8 30.2,18.9 31.2,19.9 31.2,21.7 31.9,21.7 32.3,21.3
VSYS on Bottom Layer "VSYS_Converters" (solid, pour order 14): 37.295,13.5 35.495,11.7 35.495,9.2 38.7,9.2 39.2,8.2 40,8.2 40,9.2 40.7,9.9 40.7,13.5
NetL2_2 on Bottom Layer "VL_BoostConv" (solid, pour order 16): 40,7.5 40,7.1 35.7,7.1 35.5,7.3 35.5,8.6 38.6,8.6 38.8,8.4 38.8,7.8 39.1,7.5
5V on Bottom Layer "5V_BoostConv" (solid, pour order 18): 38.5,7 38.5,4.4 37.8,3.7 37.8,2.9 39.5,1.2 40.1,1.2 41.9,1.2 41.9,2.5 40.1,2.5 40.1,4.2 39.9,4.4 39.9,4.7 39.4,5.5 39.4,6.4 39.4,6.6 40,6.6 40,6.8 40,7 39.8,7
NetL1_1 on Bottom Layer "VL_BuckConv" (solid, pour order 22): 40.1,15.7 40.4,15.7 40.4,16.2 40.4,16.6 40.6,16.8 40.976,17.176 40.992,17.176 40.992,20.224 40.916,20.3 39.8,20.3 39.8,17.1 40.1,16.8
5V on Bottom Layer "5V_CurrentLimit" (solid, pour order 24): 44.7,29 44.7,27.8 41.8,27.8 41.6,28 40.3,28 40.3,28.8 43.6,28.8 43.8,29
NetC60_2 on Bottom Layer "5V_USB_Output" (solid, pour order 26): 42,33.9 42,29.5 40.3,29.5 38.8,28 37.8,28 37.8,29 38.8,30 38.8,32.4 41.5,32.4 41.5,33.9
V_CHG_USB on Bottom Layer "5V_USB_Charge" (solid, pour order 28): 30.4,27.8 30.4,27.2 31.2,27.2 31.6,26.8 33.4,26.8 34.6,26.8 34.6,27.9 33.3,27.9 31.4,27.9 31.3,27.9 31.2,27.8
V_BATT on Bottom Layer "V_BATT" (solid, pour order 30): 30.4,27 30.4,26.3 31.1,26.3 32.4,25 32.4,24.2 32.8,24.2 32.8,25.2 32.9,25.3 32.9,26 32.9,26.7 31.4,26.7 31.1,27
NetC1_2 on Bottom Layer "DC_Input" (solid, pour order 32): 25.7,33.8 25.7,28.3 25.7,28.1 26.4,27.4 27.2,27.4 27.2,26.8 26.5,26.8 26.3,26.8 26.2,26.7 24.8,26.7 24.8,27.8 23.9,28.7 23.9,31.3 23.9,33.8
NetC3_2 on Bottom Layer "VSYS" (solid, pour order 34): 29.7,26.1 29.1,26.1 29.1,25.3 28.7,24.9 28.7,23.2 29.9,23.2 29.9,25.1 29.7,25.3 29.7,26.1
V_LDO on Bottom Layer "VLDO_U1" (solid, pour order 38): 32.5,30.8 31.5,30.8 31.5,28.7 31,28.2 30.9,28.2 30.9,28 31.1,28 31.5,28 32.5,29
3V3 on Bottom Layer "3V3_BuckConv" (solid, pour order 20): 41.301,14.612 41.301,16.201 41.5,16.4 41.5,20.2 43.2,20.2 43.2,16.6 42.4,14.3 41.301,14.3
V_CHG_USB on Bottom Layer "VUSB_U5" (solid, pour order 40): 31.4,17 29.9,17 29.9,16.1 29.9,16 30.3,15.6 30.3,14.8 30.7,14.8 30.7,15.6 31.4,16.3
GND on Bottom Layer "GND_BOT" (solid, pour order 78): 24.8,26.2 26.5,26.2 27.2,26.2 28.2,25.2 28.2,23.1 28.2,22.9 29.9,22.9 29.9,22.2 29.8,22.1 24.8,22.1
GND on Bottom Layer "GND_BOT" (solid, pour order 80): 11.1,22.5 19.4,22.5 19.4,19.2 11.1,19.2
GND on Bottom Layer "GND_BOT" (solid, pour order 84): 29.6,16.9 29.6,15.6 24.8,15.6 24.8,16.5 28.2,16.5 28.2,16.9
GND on Bottom Layer "GND_BOT" (solid, pour order 90): 40.3,27.8 40.3,25.1 39.9,25.1 39.9,23.9 43.2,23.9 43.2,27.8
GND on Bottom Layer "GND_BOT" (solid, pour order 92): 33,24.5 33,26.7 34.8,26.7 34.8,26.1 33.8,25.1 33.2,24.5
GND on Bottom Layer "GND_BOT" (solid, pour order 82): 40.6,2.8 42,2.8 42,14.2 41.7,14.2 41.3,14.6 41.3,15.4 40.6,15.4 40.6,13.8 41,13.4 41,9.7 40.3,9 40.3,2.8
GND on Bottom Layer "GND_BOT" (solid, pour order 94): 44.3,16.4 44.3,13.1 41.9,13.1 42,13.2 42,14.2 42,16.4
GND on Bottom Layer "GND_BOT" (solid, pour order 74): 26.3,36.9 47.5,36.9 47.5,32.4 26.3,32.4
GND on Bottom Layer "GND_BOT" (solid, pour order 76): 26.1,30.5 26.7,30.5 26.8,30.6 26.8,31.1 26.8,31.6 27.6,32.4 27.6,33.5 26.1,33.5
GND on Bottom Layer "GND_BOT" (solid, pour order 86): 32.3,28.5 33.8,28.5 33.8,32.6 32.8,32.6 32.6,32.4 32.6,29.9 32.3,29.9
GND on Bottom Layer "GND_BOT" (solid, pour order 88): 36.6,28.1 36.6,32.6 38.9,32.6 38.8,32.5 38.8,28.1
GND on Top Layer "GND_Edison" (solid, pour order 52): 47.498,28.067 47.498,33.909 44.958,33.909 44.958,29.464 45.72,29.464 45.72,28.067
VSYS on Top Layer "VSYS_Edison" (solid, pour order 50): 50.419,32.131 50.419,30.099 48.387,30.099 48.387,30.861 48.006,31.242 46.863,31.242 46.863,32.131
V_LDO on Top Layer "LED_VLDO" (solid, pour order 46): 30.9,30.3 30.9,30.9 31.3,31.3 31.3,35.2 32.2,36.1 35,36.1 35,35.2 32.4,35.2 32.1,34.9 32,34.8 32,30.3
3V3 on Top Layer "3V3_DWM" (solid, pour order 42): 16.7,5 20.7,5 20.7,1.5 16.7,1.5
GND on Top Layer "GND_DWM" (solid, pour order 44): 14.5,12 14.5,13.3 14,13.3 13.6,13.7 13.6,16.8 11.2,16.8 11.2,14.3 13.5,12
GND on Top Layer "GND_TOP" (solid, pour order 64): 11.1,25.7 23,25.7 23.7,25.7 23.9,25.5 23.9,18 17.5,18 16.5,17 16.5,14.2 16.4,14.1 11.2,14.1
GND on Top Layer "GND_TOP" (solid, pour order 66): 20.3,26.8 25.9,26.8 25.9,28.5 20.3,28.5
GND on Top Layer "GND_TOP" (solid, pour order 68): 21,4.1 21,1 36,1 36,4.1
GND on Top Layer "GND_TOP" (solid, pour order 70): 40.7,18.5 40.7,19.1 38.2,19.1 38.14,19.1 37.99,19.25 38,19.26 38,19.6 37.2,19.6 37.21,19.59 37.21,19.25 37.21,18.51 37.2,18.5
GND on Top Layer "GND_TOP" (solid, pour order 72): 34.5,19.1 34.5,17.5 38,17.5 38,18.9 37.7,18.9 37.5,19.1
3V3 on Mid-Layer 3 "3V3_Bridge" (solid, pour order 56): 36.3,19 42.6,19 42.6,14.3 36.3,14.3
GND on Ground (split plane): 51.398,14.7 44.7,14.7 44.7,1.102 11.1,1.102 11.1,27 1.102,27 1.102,36.398 51.398,36.398
3V3 on Power (split plane): 41.198,33.422 34.224,17.882 32.602,17.882 32.602,20.125 32.602,23.458 36.072,26.928 36.094,26.961 36.102,27 36.102,32 36.102,36.398 41.198,36.398
NetJ2_1 on Power (split plane): 24.298,31.5 24.301,31.483 24.304,31.465 27.904,21.465 27.905,21.463 27.906,21.461 27.916,21.446 27.925,21.431 27.927,21.43 27.928,21.428 27.942,21.418 27.957,21.408 27.959,21.407 27.961,21.406 27.978,21.402 27.995,21.398 27.998,21.399 28,21.398 30.898,21.398 30.898,17.702 26.04,17.702 21.202,32.117 21.202,34.2 21.202,34.349 24.298,34.349
5V on Power (split plane): 51.398,29.898 51.398,14.707 44.831,14.707 44.792,14.699 44.759,14.677 44.737,14.644 44.729,14.605 44.729,1.102 33.602,1.102 33.602,3.398 40,3.398 40.039,3.406 40.072,3.428 43.072,6.428 43.094,6.461 43.102,6.5 43.102,20.5 43.134,28.781 43.57,29.898 48.379,29.898
V_CHG_USB on Power (split plane): 35.898,32 35.898,27.042 32.428,23.572 32.406,23.539 32.398,23.5 32.398,20.125 32.398,16.202 30.102,16.202 30.102,17.498 31,17.498 31.039,17.506 31.072,17.528 31.094,17.561 31.102,17.6 31.102,28 31.094,28.039 31.072,28.072 28.602,30.542 28.602,32 28.602,33.9 28.602,34.2 28.602,36.398 35.898,36.398
VSYS on Power (split plane): 51.398,30.102 48.379,30.102 43.5,30.102 43.499,30.102 43.498,30.102 43.479,30.098 43.461,30.094 43.46,30.094 43.459,30.093 43.444,30.083 43.428,30.072 43.427,30.071 43.426,30.071 43.416,30.055 43.406,30.039 43.406,30.038 43.405,30.037 42.937,28.837 42.934,28.819 42.93,28.8 42.898,20.602 39.796,20.602 39.795,20.602 39.793,20.602 39.775,20.598 39.757,20.594 39.756,20.594 39.755,20.593 39.739,20.583 39.724,20.572 39.723,20.571 39.722,20.571 39.712,20.555 39.701,20.539 39.701,20.538 39.701,20.537 38.64,17.817 38.637,17.798 38.633,17.78 38.633,14.732 38.641,14.693 38.663,14.66 39.522,13.801 39.522,10.262 20.907,10.262 15.602,30.493 15.602,32.918 20.998,32.918 20.998,32.1 21.001,32.084 21.003,32.068 25.87,17.568 25.872,17.564 25.872,17.561 25.881,17.547 25.89,17.533 25.892,17.531 25.894,17.528 25.908,17.519 25.921,17.509 25.924,17.508 25.927,17.506 25.944,17.503 25.959,17.498 25.963,17.499 25.966,17.498 29.898,17.498 29.898,16.1 29.906,16.061 29.928,16.028 29.961,16.006 30,15.998 32.5,15.998 32.539,16.006 32.572,16.028 32.594,16.061 32.602,16.1 32.602,17.678 34.29,17.678 34.308,17.682 34.326,17.685 34.328,17.686 34.329,17.686 34.344,17.696 34.36,17.706 34.361,17.707 34.362,17.708 34.372,17.723 34.383,17.738 41.393,33.358 41.393,33.36 41.394,33.361 41.398,33.379 41.402,33.397 41.402,33.399 41.402,33.4 41.402,36.398 51.398,36.398
NetC3_2 on Power (split plane): 28.398,34.2 28.398,33.9 28.398,32 28.398,30.5 28.406,30.461 28.428,30.428 30.898,27.958 30.898,21.602 28.072,21.602 24.502,31.518 24.502,34.451 24.494,34.49 24.472,34.523 24.439,34.545 24.4,34.553 21.1,34.553 21.061,34.545 21.028,34.523 21.006,34.49 20.998,34.451 20.998,34.2 20.998,33.7 20.998,33.122 15.602,33.122 15.602,36.398 28.398,36.398
3V3 on Power (split plane): 15.398,30 15.406,29.961 15.428,29.928 15.461,29.906 15.5,29.898 15.539,29.906 15.544,29.909 20.729,10.134 20.732,10.128 20.734,10.121 20.741,10.11 20.747,10.098 20.752,10.094 20.756,10.088 20.767,10.081 20.777,10.072 20.783,10.07 20.789,10.066 20.802,10.063 20.814,10.059 20.821,10.059 20.828,10.058 39.624,10.058 39.663,10.066 39.696,10.088 39.718,10.121 39.726,10.16 39.726,13.843 39.718,13.882 39.696,13.915 38.837,14.774 38.837,17.761 39.865,20.398 42.898,20.398 42.898,6.542 39.958,3.602 33.5,3.602 33.461,3.594 33.428,3.572 33.406,3.539 33.398,3.5 33.398,1.102 11.151,1.102 11.151,26.924 11.143,26.963 11.121,26.996 11.088,27.018 11.049,27.026 1.102,27.026 1.102,36.398 15.398,36.398

## Other copper
Top Layer:
  region: 32.4,22.3 34.4,22.3 34.4,24.7 33.4,24.7 32.4,23.7
Mid-Layer 3:
  region net GND: 27.6,28.8 27.6,26.7 30,26.7 30,28.8
Bottom Layer:
  region: 32.1,23.9 32.1,22.3 34.2,22.3 34.2,23.9
Ground (plane layer: these items are gaps in the copper):
  rectangle: 44.7,0 52.5,14.7
  rectangle: 0,0 11.1,27
  rectangle: 0,26.5 1,37.5
  rectangle: 0,36.5 52.5,37.5
  rectangle: 51.5,13.5 52.5,37.5
  rectangle: 10.5,0 46,1
  lines w0.2: 1,1 1,36.5 51.5,36.5 51.5,1 1,1
Power (plane layer: these items are gaps in the copper):
  rectangle: 44.831,0 52.5,14.605
  rectangle: 0,0 11.049,26.924
  rectangle: 10.5,0 46,1
  rectangle: 51.5,14 52.5,37.5
  rectangle: 0,36.5 52.5,37.5
  rectangle: 0,26 1,37.5
  lines w0.2: 15.5,30 15.5,36.5 ; 15.5,30.48 20.828,10.16 34.925,10.16 39.624,10.16 39.624,13.843 ; 15.5,33.02 21.1,33.02 ; 21.1,33.7 21.1,34.451 24.4,34.451 24.4,31.5 28,21.5 31,21.5 ; 21.1,34.2 21.1,32.1 25.966,17.6 30,17.6 ; 28.5,36.5 28.5,34.2 28.5,33.9 28.5,32 28.5,30.5 31,28 31,17.6 30,17.6 ; 32.5,17.78 34.29,17.78 41.3,33.4 41.3,36.5 ; 33.5,1 33.5,3.5 40,3.5 43,6.5 43,20.5 ; 36,36.5 36,32 36,27 32.5,23.5 32.5,20.125 32.5,16.1 30,16.1 30,17.6 ; 51.5,30 48.379,30 44,30 43.5,30 43.032,28.8 43,20.5 ; 38.735,14.732 39.624,13.843 ; 38.735,14.732 38.735,17.78 39.796,20.5 43,20.5 ; 38.735,14.732 39.624,13.843 ; 1,26.924 1,36.5 51.5,36.5 51.5,14.605 44.831,14.605 44.831,1 11.049,1 11.049,26.924 1,26.924

## Silkscreen, mask and mechanical layers (free items; w line width, h text height)
Bottom Overlay:
  drawing of 845 lines, arcs and shapes, not listed
  text "05/2016 bunto1" at 2.5,9.5 h1 r270
  text "Rev 1.0" at 4.5,9.5 h1 r270
  text "EdisonDecaAnchor" at 6.5,9.5 h1 r270
Mechanical 1:
  the board outline again, w0.2
  text ".Pcb_File_Name_No_Path" at 0,-2.5 h1.52

## Text inside footprints (layer, text, board x,y; h text height)
P1: Mechanical 15 "1" at 46.525,32.35 h1.52 r270